# Altium PCB usb_ttl_pcb.PcbDoc
Units mm, origin at the board's own origin, x right, y up, seen from the top; angles counter-clockwise.
Board outline 45.82 x 26.2 mm, 2 copper layers (Top Layer, Bottom Layer); 18 components, 15 nets, 58 pads, 8 vias.
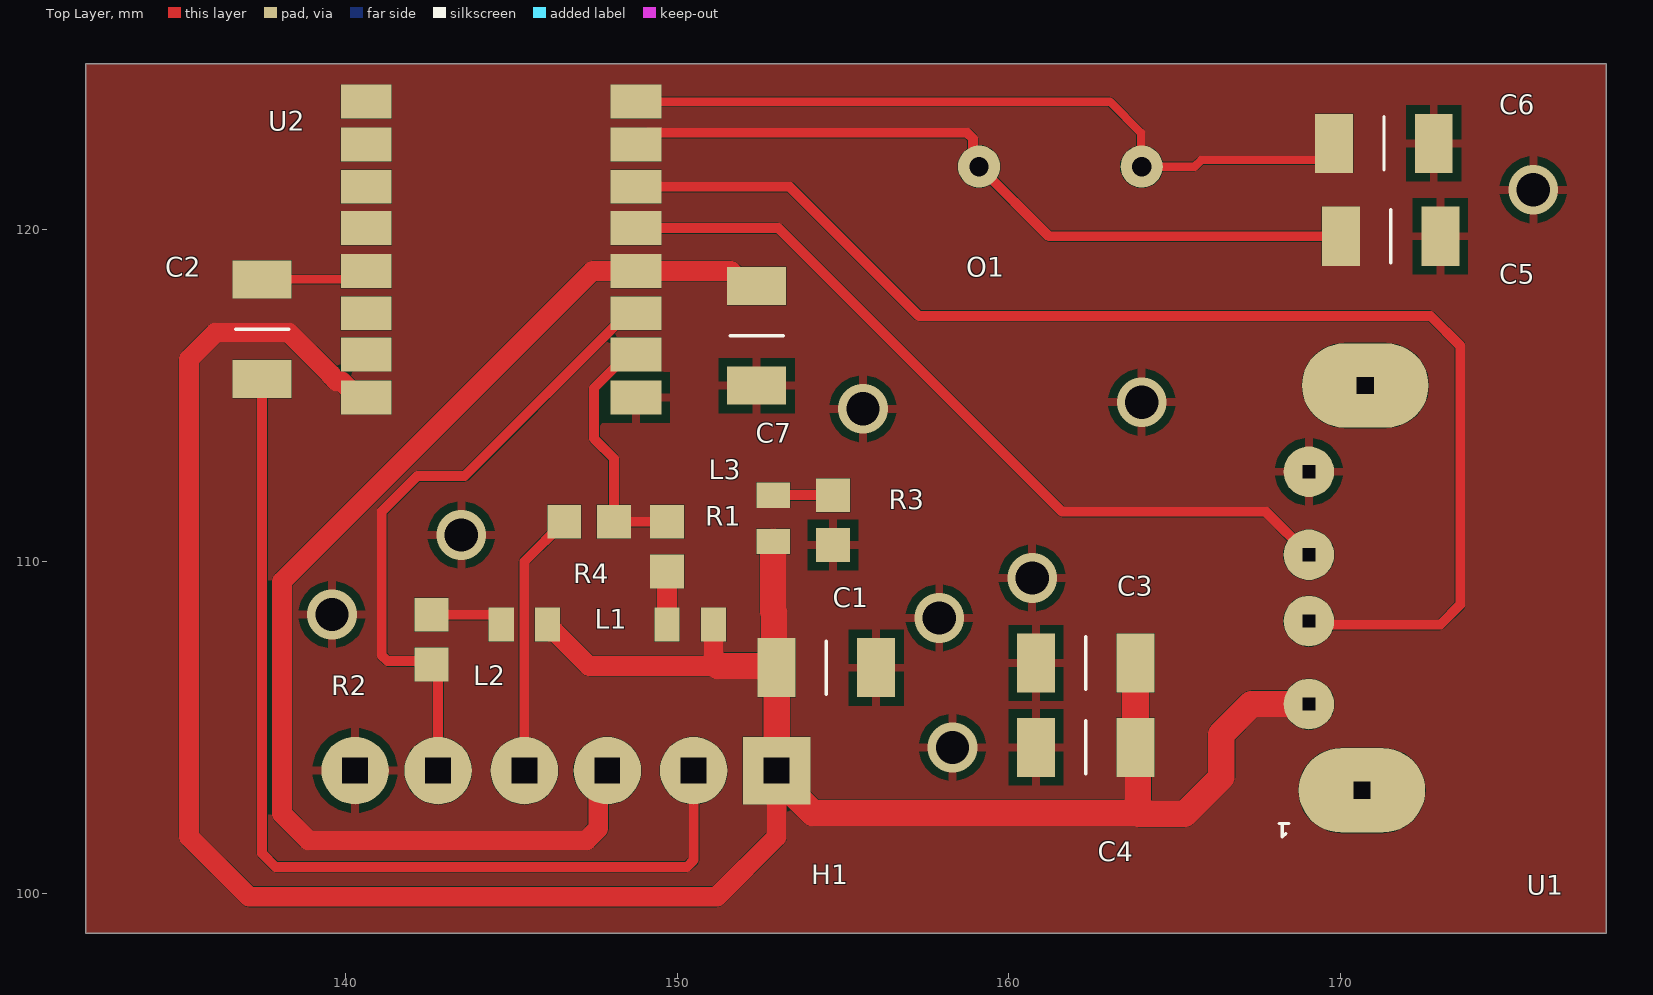
[diagram p0: Top Layer view]
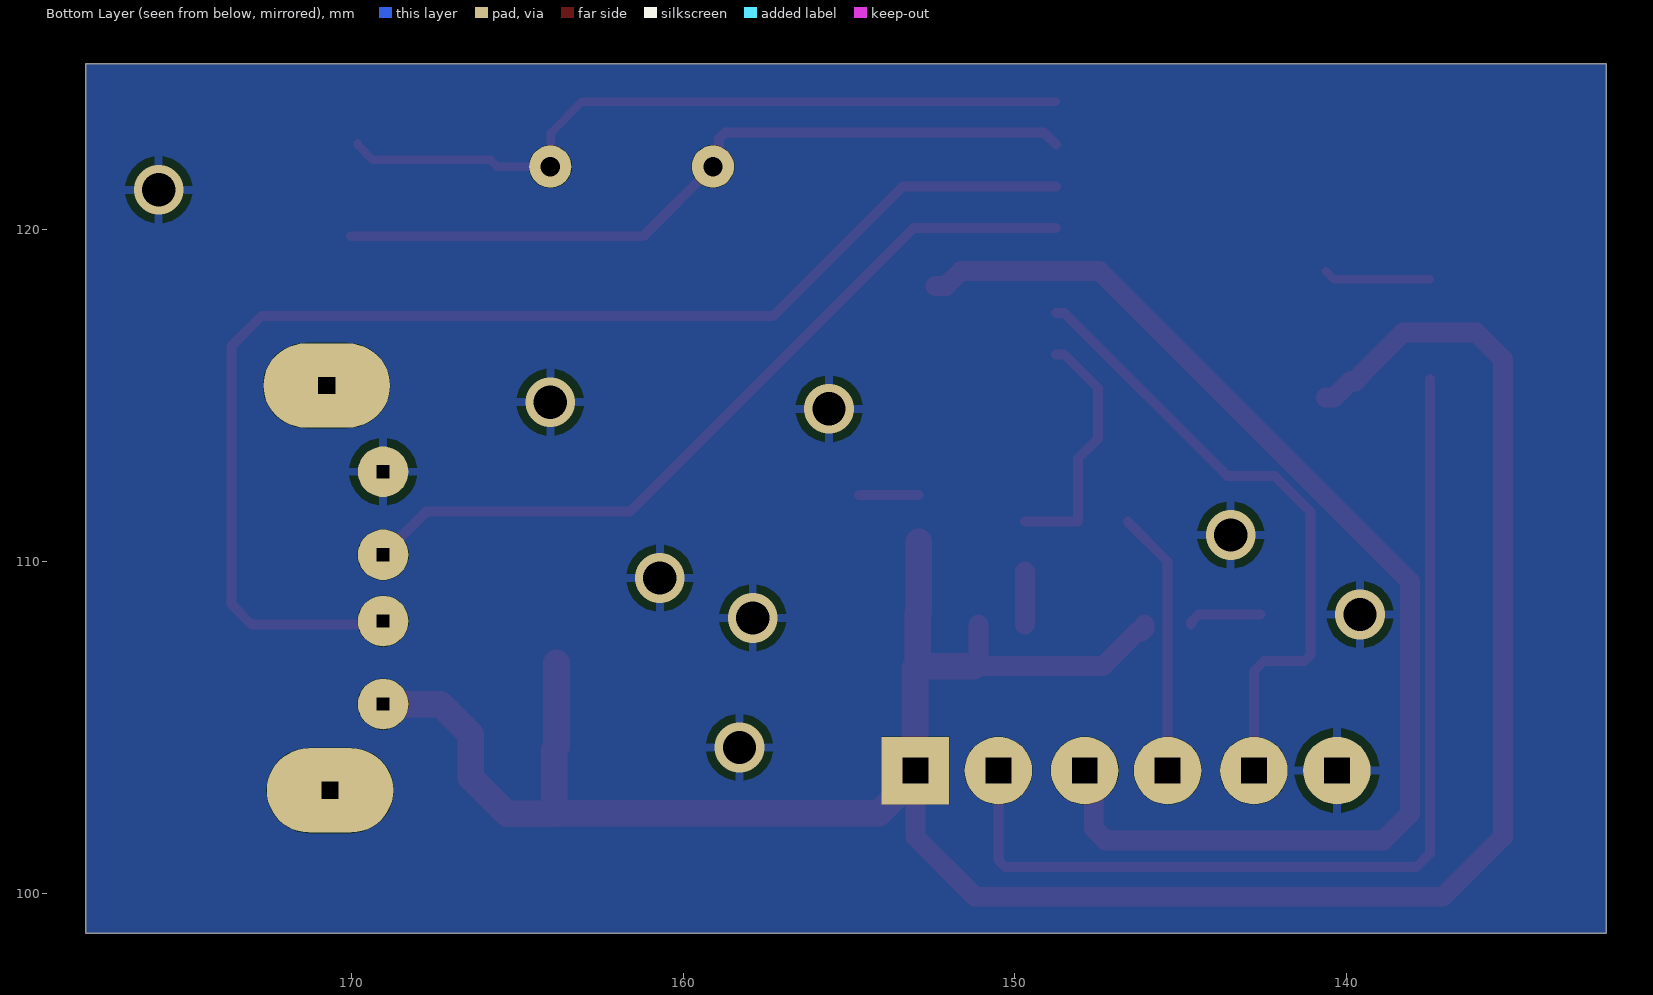
[diagram p1: Bottom Layer view, seen from below]
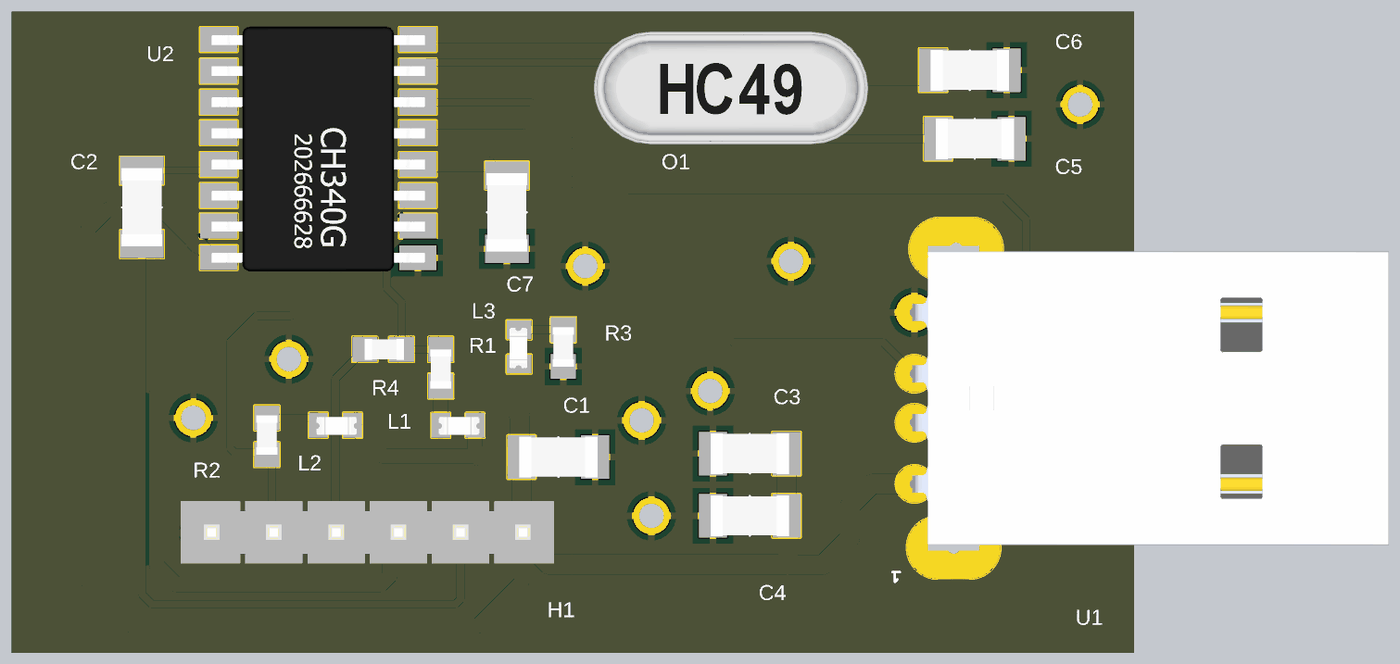
[diagram p2: 3D render of the assembled board from above, using the file's embedded part models]

## Layer stack, top to bottom
Top Solder: solder mask 0.0102, Solder Resist, Dk 3.5
Top Layer: signal copper 0.0356
Dielectric 1: dielectric 0.32, FR-4, Dk 4.8
Bottom Layer: signal copper 0.0356
Bottom Solder: solder mask 0.0102, Solder Resist, Dk 3.5

## Board outline
132.182,98.8 132.182,125 178,125 178,98.8

## Design rules (kind name [scope] priority, off if disabled: settings)
Clearance [All] p1: gap=0.006 ignorepadtopadclearanceinfootprint=FALSE except(0.004: Arc-Arc Arc-Track Arc-SMDPad Arc-Poly Track-Track Track-SMDPad Track-Poly SMDPad-SMDPad SMDPad-Poly THPad-Poly Via-Poly Fill-Poly Poly-Poly)
HoleSize [All] p1: absolutevalues=TRUE maxlimit=2.5 minlimit=0.001 maxpercent=80.000 minpercent=20.000
MinimumSolderMaskSliver [All] p1: minsoldermaskwidth=0.025
PolygonConnect [All] p1: connectstyle=Relief reliefconductorwidth=0.254 reliefentries=4 polygonreliefangle="90 Angle" airgapwidth=0.254
RoutingVias [All] p1: holewidth=0.008 width=0.015 viastyle="Through Hole" minholewidth=0.005 minwidth=0.005 maxholewidth=0.023 maxwidth=0.032
SolderMaskExpansion [All] p1: expansion=0.051 istentingtop=FALSE
Width [All] p1: maxlimit=3 minlimit=0.254 preferedwidth=0.6 minimp=50.000000 maximp=50.000000 favimp=50.000000
28 further rules are at their usual default settings.

## Components (designator, comment, footprint, x,y, rotation, side; value= is the part's Value field where it differs from the comment)
C1 "CAPACITOR 100nF C1206" "CAPACITOR C1206" 153.9,104.8 r0 top
C2 "CAPACITOR 100nF C1206" "CAPACITOR C1206" 135.5,117.6 r270 top
C3 "CAPACITOR 10uF C1206" "CAPACITOR C1206" 161.714,104.942 r0 top
C4 "CAPACITOR 100nF C1206" "CAPACITOR C1206" 161.714,102.402 r0 top
C5 "CAPACITOR 22pF C1206" "CAPACITOR C1206" 172.1,121.8 r180 top
C6 "CAPACITOR 22pF C1206" "CAPACITOR C1206" 171.9,124.6 r180 top
C7 "CAPACITOR 100nF C1206" "CAPACITOR C1206" 150.4,117.4 r270 top
H1 "Header 1x6 pin" "header 1x6" 156.8,102.4 r180 top
L1 "LED" led 150.4,108.1 r180 top
L2 "LED" led 145.4,108.1 r180 top
L3 "LED" led 152.9,111.3 r90 top
O1 "CRYSTAL OSCILLATOR" "CRYSTAL OSC." 171.75,129.662 r0 top
R1 "RESISTOR 1K" "RESISTOR 1K" 150.5,108.7 r90 top
R2 "RESISTOR 1K" "RESISTOR 1K" 141.8,109.4 r270 top
R3 "RESISTOR 1K" "RESISTOR 1K" 153.9,113 r270 top
R4 "RESISTOR 1K" "RESISTOR 1K" 149.1,112 r180 top
U1 "usb_male_style_a_4_pin" "usb_style a_male 4_contact" 163.037,106.404 r180 top
U2 "CH340G" CH340G 144.7,119.4 r180 top

## Footprints (in the part's own frame and the unit in brackets; to place one, negate y for a bottom-side part, rotate by r counter-clockwise, add the part's x,y. Pads: shape width x height; smd on the part's side, far side on the other; paste and mask are expansions set on the pad)
"CAPACITOR C1206" [mm]
  rect 1.143x1.778 smd: 1(-0.9,2) 2(2.1,2)
  silkscreen extent 0.6,1.2 0.6,2.8, body extent -1,1.17 2.2,2.83, height 1.78
CH340G [mil]
  rect 60x40 smd mask+2: 1(-160,175.5) 2(-160,124.5) 3(-160,75.5) 4(-160,25.5) 5(-160,-25.5) 6(-160,-74.5) 7(-160,-124.5) 8(-160,-175.5) 9(160,-175.5) 10(160,-124.5) 11(160,-74.5) 12(160,-25.5) 13(160,25.5) 14(160,75.5) 15(160,124.5) 16(160,175.5)
  body extent -171,-196 171,197, height 74
"CRYSTAL OSC." [mil]
  round 50 hole 23: 1(-498.05,-305.6) 2(-305.13,-305.6)
  body extent -622,-397 -181,-216, height 153
"header 1x6" [mil]
  rect 80x80 hole 30 square: 1(149.61,-51.18)
  round 80 hole 30 square: 2(248.03,-51.18) 3(350.39,-51.18) 4(448.82,-51.18) 5(551.18,-51.18) 6(649.61,-51.18)
  body extent 98,-102 698,-2, height 354
led [mil]
  rect 30x40 smd: 1(-27.56,0) 2(27.56,0)
  body extent -34,-13 31,15, height 32
"RESISTOR 1K" [mm]
  rect 1.016x1.016 smd: 1(1,0.8) 2(2.5,0.8)
  body extent 0.9,0.37 2.5,1.23, height 0.61
"usb_style a_male 4_contact" [mil]
  round 60 hole 15 square: 1(-236.22,27.56) 2(-236.22,-70.87) 3(-236.22,-149.61) 4(-236.22,-248.03)
  oval 150x100 hole 20 square: ""(-303.15,-350.39) ""(-299.21,129.92)
  silkscreen extent -213,169 -201,185, body extent -998,-356 -228,135, height 161

## Part data
C1 C2 C4 C7: "CAP 100nF C1206"
C3: "CAP 10 uF C1206"
C5 C6: "CAP 22pF C1206"
H1: "header 1x6 pim ,2.54 pin gap"
O1: "HC49 ,CRYSTAL OSCILLATOR 12MHz"
U1: "USB 4 PIN ,STYLE A,MALE"
U2: "CH320G ,USB_TO_TTL CONVERTER"

## Via types
v1: diameter 1.5, hole 1, Top Layer to Bottom Layer, 8 vias

## Nets (pads, with @x,y where several pads share a name; then routed paths per layer and width w, separated by ;. In a path a pad name is that pad's centre, name@x,y a point inside that pad or via, vN(x,y) a via of type N, cw(c..) or ccw(c..) an arc to the next point about the centre after c; other vN are vias at no path point)
3.3V: C7.1 H1.3 U2.4 | length 37.2
  Top Layer w0.6: H1.3 147.626,103.426 147.626,101.951 147.275,101.6 138.9,101.6 138.1,102.4 138.1,109.4 147.452,118.752 U2.4 151.63,118.752 152.082,118.3 C7.1
5V: C1.1 C3.2 C4.2 H1.1 L1.1 L2.1 L3.1 U1.1 U2.16 | length 80.9
  Top Layer w0.6: U2.16 140.382,114.942 139.898,115.426 139.748,115.426 139.57,115.604 139.57,115.63 138.3,116.9 136.1,116.9 135.3,116.1 135.3,101.7 137.1,99.9 151.2,99.9 153,101.7 H1.1 ; L2.1 146.1,107.973 146.181,107.892 146.308,107.892 147.35,106.85 151.25,106.85 151.1,107 L1.1
  Top Layer w0.8: 151.25,106.85 C1.1@152.95,106.85 ; L3.1 152.9,108.481 152.929,108.452 152.929,106.871 C1.1@152.95,106.85 ; C3.2 C4.2 163.885,104.331 163.885,102.715 ; U1.1 167.304,105.704 166.4,104.8 166.4,103.5 165.3,102.4 163.9,102.4 163.885,102.415 154.102,102.415 153.516,103 153.516,103.184 H1.1 C1.1 C1.1@152.95,106.85
GND: C1.2 C3.1 C4.1 C5.1 C6.1 C7.2 H1.6 R3.2 U1.4 U2.1
  other v1: 158.3,104.4 157.9,108.3 139.6,108.4 160.7,109.5 143.5,110.8 155.6,114.6 164,114.8 175.8,121.2
NetC2_1: C2.1 U2.13 | length 3.2
  Top Layer w0.254: C2.1 140.384,118.5 U2.13
NetC2_2: C2.2 H1.2 | length 30.2
  Top Layer w0.3: C2.2 137.5,101.2 137.9,100.8 150.3,100.8 150.5,101 H1.2
NetC5_2: C5.2 O1.1 U2.7 | length 23.1
  Top Layer w0.3: U2.7 149.122,122.92 158.739,122.92 158.914,122.745 158.914,122.086 O1.1 161.2,119.8 C5.2
NetC6_2: C6.2 O1.2 U2.8 | length 22.8
  Top Layer w0.254: U2.8 163.042,123.858 163.984,122.916 163.984,121.916 O1.2 165.6,121.9 165.8,122.1 169.356,122.1 169.8,122.544 C6.2
NetH1_4: H1.4 R4.2 | length 8
  Top Layer w0.3: H1.4 145.4,110 R4.2
NetH1_5: H1.5 R2.2 U2.3 | length 19.4
  Top Layer w0.3: H1.5 142.8,106.7 R2.2 142.5,107 141.276,107 141.1,107.176 141.1,111.5 142.172,112.572 143.6,112.572 148.51,117.482 U2.3
NetL1_2: L1.2 R1.1 | length 1.6
  Top Layer w0.6: L1.2 R1.1
NetL2_2: L2.2 R2.1 | length 2.3
  Top Layer w0.3: R2.1 144.469,108.4 144.7,108.169 L2.2
NetL3_2: L3.2 R3.1 | length 1.8
  Top Layer w0.3: L3.2 R3.1
NetR1_2: R1.2 R4.1 U2.2 | length 7.6
  Top Layer w0.3: U2.2 148.51,116.238 147.5,115.228 147.5,113.7 148.1,113.1 R4.1 R1.2
NetU1_2: U1.2 U2.6 | length 39.5
  Top Layer w0.3: U2.6 153.392,121.292 157.284,117.4 172.7,117.4 173.6,116.5 173.6,108.7 173,108.1 169.141,108.1 U1.2
NetU1_3: U1.3 U2.5 | length 24.4
  Top Layer w0.3: U2.5 153.052,120.048 161.6,111.5 167.741,111.5 U1.3
pads on no net: U1. U2.9 U2.10 U2.11 U2.12 U2.14 U2.15

## Polygon pours and split planes (outlines as drawn)
GND on Bottom Layer "GND_L02_P001" (solid, pour order 1): 132.2,125 132.2,98.8 178,98.8 178,125
GND on Top Layer "GND_L01_P000" (solid, pour order 0): 132.2,125 178,125 178,98.8 132.189,98.8 132.184,98.805 132.2,98.821

## Silkscreen, mask and mechanical layers (free items; w line width, h text height)
Mechanical 1:
  the board outline again, w0.076